# Altium PCB StepperV2.PcbDoc
Units mil, origin at the board's own origin, x right, y up, seen from the top; angles counter-clockwise.
Board outline 4995 x 4000 mil, 2 copper layers (Top Layer, Bottom Layer); 58 components, 47 nets, 208 pads, 181 vias.
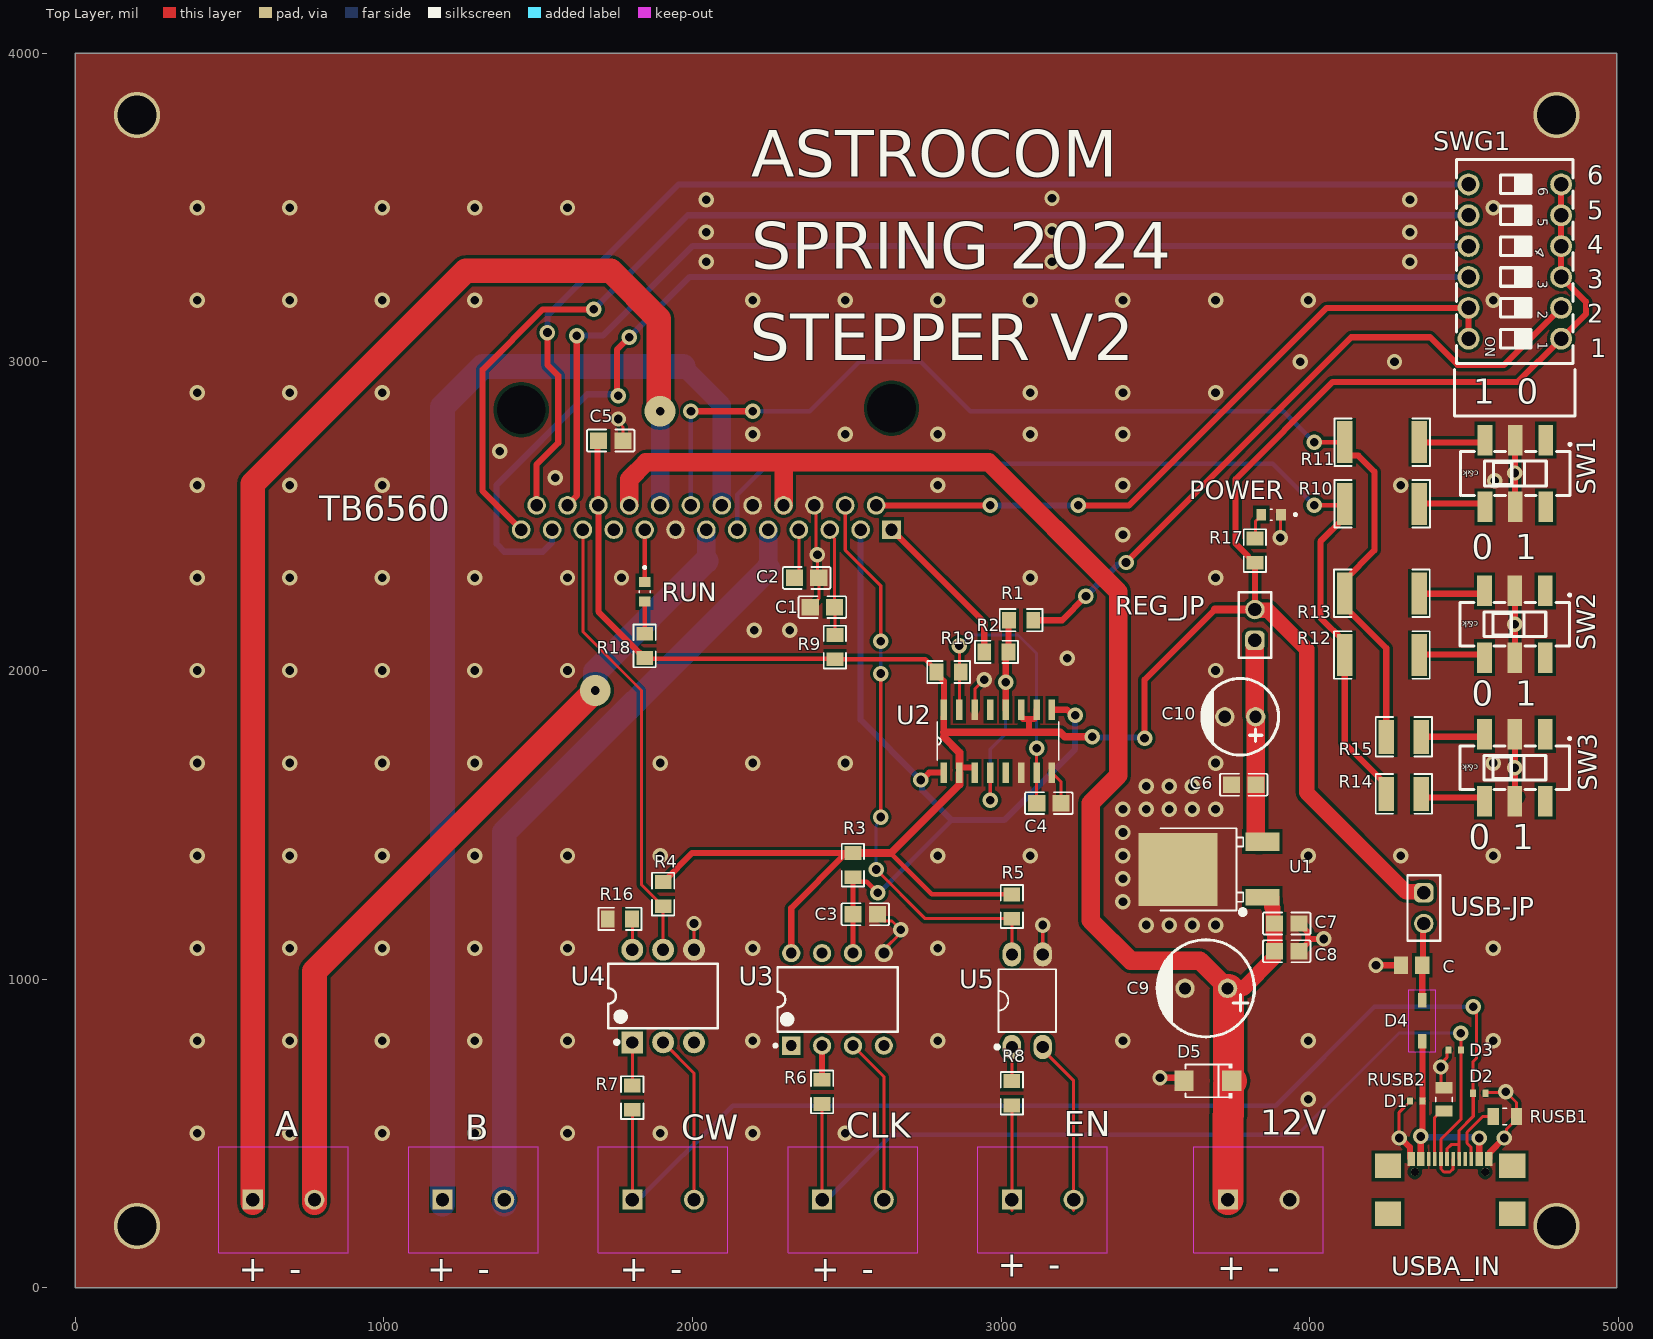
[diagram p0: Top Layer view]
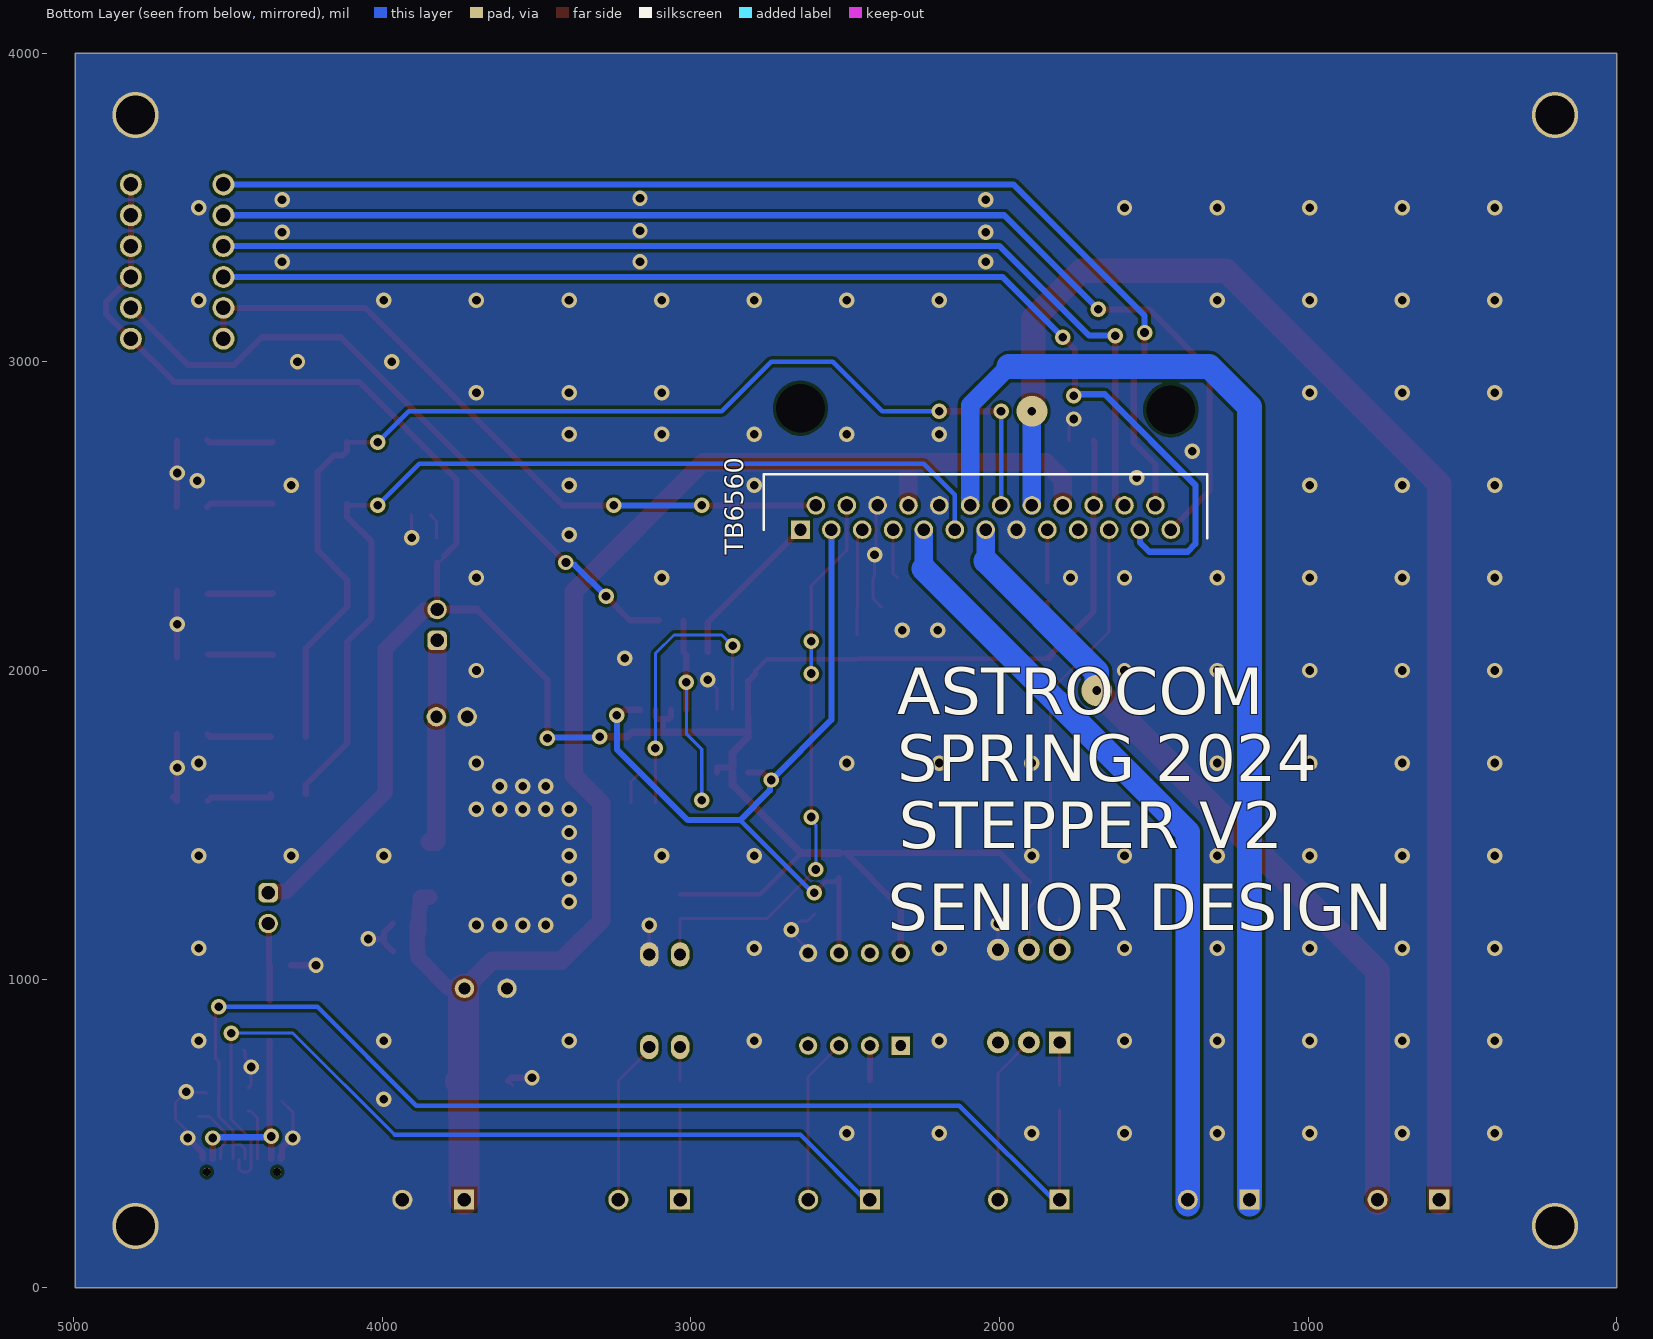
[diagram p1: Bottom Layer view, seen from below]
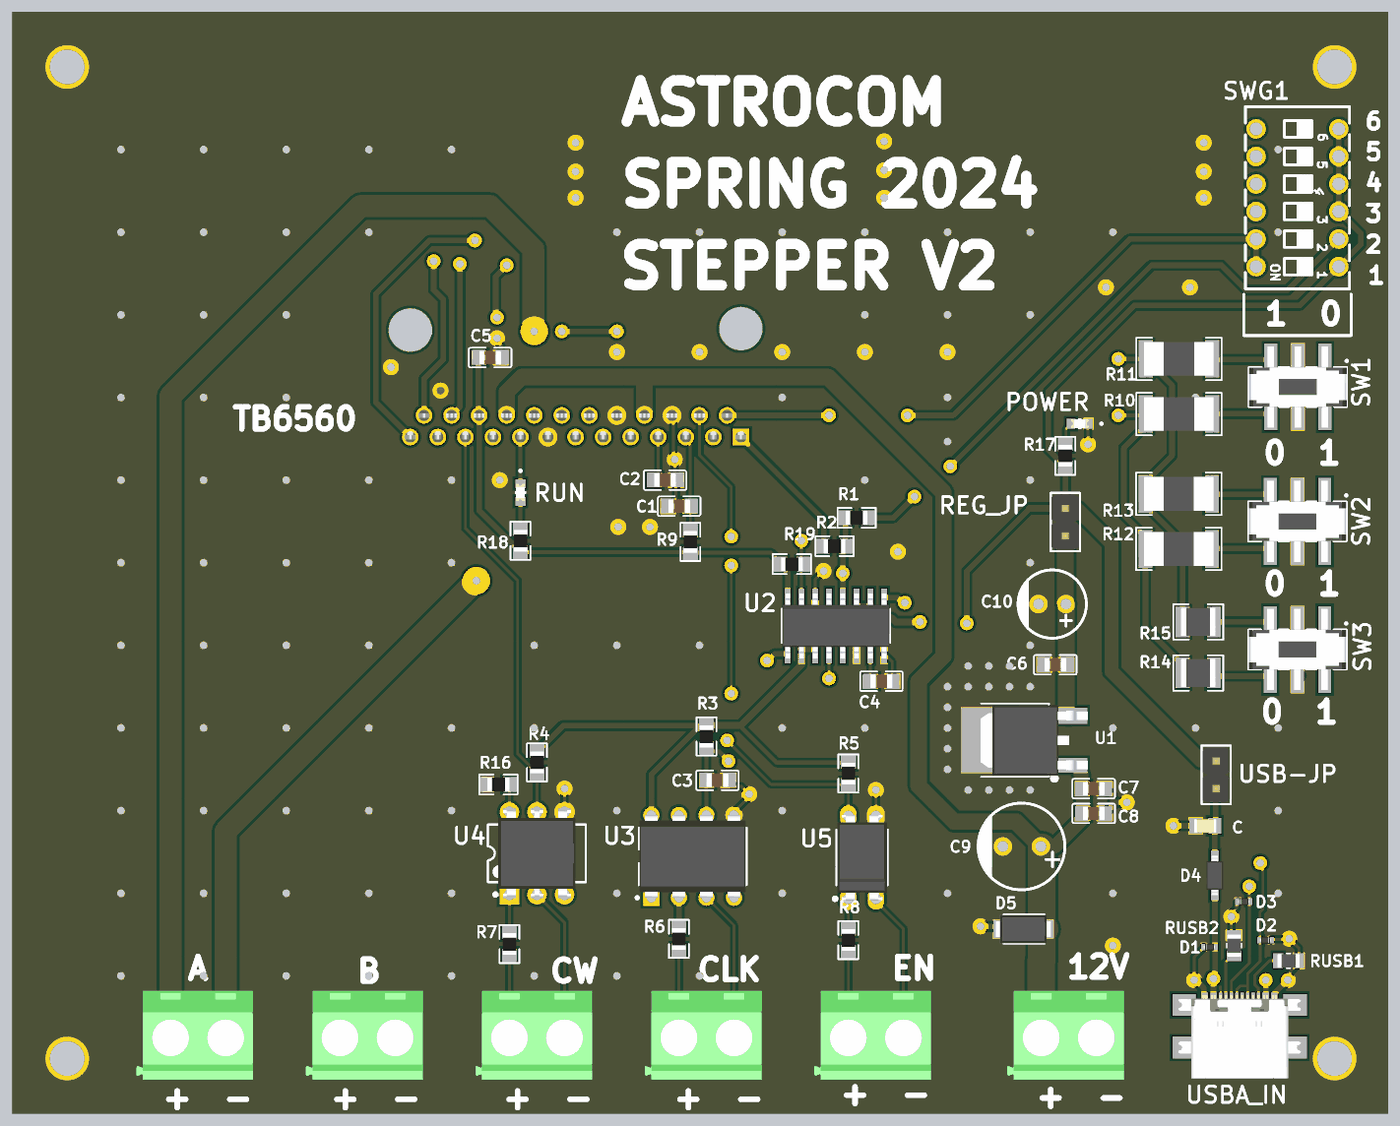
[diagram p2: 3D render of the assembled board from above, using the file's embedded part models]

## Layer stack, top to bottom
Top Solder: solder mask 0.4, Solder Resist, Dk 3.5
Top Layer: signal copper 1.4
Dielectric 1: dielectric 12.6, FR-4, Dk 4.8
Bottom Layer: signal copper 1.4
Bottom Solder: solder mask 0.4, Solder Resist, Dk 3.5

## Board outline
0,0 4995,0 4995,4000 0,4000

## Design rules (kind name [scope] priority, off if disabled: settings)
Clearance [All] p1: gap=10 ignorepadtopadclearanceinfootprint=FALSE
HoleSize [All] p1: absolutevalues=TRUE maxlimit=500 minlimit=1 maxpercent=80.000 minpercent=20.000
PolygonConnect [All] p1: connectstyle=Direct reliefconductorwidth=10 reliefentries=4 polygonreliefangle="90 Angle" airgapwidth=10
RoutingVias [All] p1: holewidth=28 width=50 viastyle="Through Hole" minholewidth=28 minwidth=50 maxholewidth=28 maxwidth=50
SolderMaskExpansion [All] p1: expansion=4 istentingtop=FALSE
Width [All] p1: maxlimit=100 minlimit=10 preferedwidth=10 minimp=50.000000 maximp=50.000000 favimp=50.000000
29 further rules are at their usual default settings.

## Components (designator, comment, footprint, x,y, rotation, side; value= is the part's Value field where it differs from the comment)
12V "Term Block" TE_282837-2 3835,285 r0 top
A "Term Block" TE_282837-2 675,285 r0 top
B "Term Block" TE_282837-2 1290,285 r0 top
C "C0805C106J8RACAUTO" CAPC2012X88N 4330.55,1045 r180 top
C1 "100nF" C0805 2421.1,2205.16 r0 top
C2 "100nF" C0805 2370,2300 r0 top
C3 "100nF" C0805 2560,1210 r0 top
C4 "100nF" C0805 3155,1570 r180 top
C5 "100nF" C0805 1735,2745 r0 top
C6 "100nF" C0805 3786.26,1629.6 r0 top
C7 "100nF" C0805 3925.63,1180 r180 top
C8 "100nF" C0805 3925.63,1090 r180 top
C9 "330uF" CAP-TH_BD8.0-P3.50-D0.6-FD 3665,970 r180 top
C10 "220uF" CAP-TH_BD6.3-P2.50-D1.0-FD 3775,1850 r180 top
CLK "Term Block" TE_282837-2 2520,285 r0 top
CW "Term BLock" TE_282837-2 1905,285 r0 top
D1 "CPDQ5V0-HF" MBTB-D-SOD-923F-IMP-0402 4345.67,605 r0 top
D2 "CPDQ5V0-HF" MBTB-D-SOD-923F-IMP-0402 4549.33,630 r180 top
D3 "CPDQ5V0-HF" MBTB-D-SOD-923F-IMP-0402 4470,770 r0 top
D4 "SCHOTTKY DIODE" SOD3715X145N 4365,865 r270 top
D5 "M7-C366566" SMAF_L3.5-W2.6-LS4.7-RD 3670,670 r180 top
EN "Term Block" TE_282837-2 3135,285 r0 top
POWER "LTST-C190GKT" LEDC1608X35N 3875,2505 r180 top
R1 "4.7kΩ" R0805 3065,2163 r180 top
R2 "4.7kΩ" R0805 2985,2060 r0 top
R3 "4.7kΩ" R0805 2520,1369.37 r270 top
R4 "4.7kΩ" R0805 1905,1275 r90 top
R5 "4.7kΩ" R0805 3035,1235 r90 top
R6 "330Ω" R0805 2420,634.37 r90 top
R7 "330Ω" R0805 1805,615.63 r90 top
R8 "330Ω" R0805 3035,630 r90 top
R9 "12kΩ" R0805 2461.73,2075.79 r270 top
R10 "330mΩ" R2512 4235,2540 r180 top
R11 "330mΩ" R2512 4235,2740 r180 top
R12 "500mΩ" R2512 4234.28,2050 r180 top
R13 "500mΩ" R2512 4234.28,2250 r180 top
R14 "1.2Ω" R1210 4305,1600 r180 top
R15 "1.2Ω" R1210 4305,1785 r180 top
R16 "100kΩ" R0805 1765,1195 r0 top
R17 "1kΩ" R0805 3822.56,2388.19 r90 top
R18 "1kΩ" R0805 1845,2080 r270 top
R19 "500kΩ" R0805 2830,1995 r180 top
REG_JP "61300211121" 61300211121 3822.56,2147.48 r90 top
RUN "LTST-C190GKT" LEDC1608X35N 1845,2255 r270 top
RUSB1 "RC0805JR-075K1L" RESC2012X60N 4632.6,555 r180 top
RUSB2 "RC0805JR-075K1L" RESC2012X60N 4435,610 r270 top
SW1 "JS202011SCQN" SW-SMD_JS202011SCQN 4666.57,2638.27 r180 top
SW2 "JS202011SCQN" SW-SMD_JS202011SCQN 4665,2150 r180 top
SW3 "JS202011SCQN" SW-SMD_JS202011SCQN 4665,1685 r180 top
SWG1 "DSWB06LHGET" SW-TH_DSWB06LHGET 4665,3325 r90 top
TB6560 "TB6560AHQ_8" TO127P530X3650X1770-25P 2645,2456.26 r180 bottom
U1 "78M05" TO-252-2_L6.5-W6.1-P4.58-LS10.0-TL 3710,1355 r180 top
U2 "74HC123D,653" SOIC127P600X175-16N 2990,1771 r90 top
U3 "6N137_C142297" DIP-8_L9.8-W6.6-P2.54-LS7.6-BL 2470,934.09 r0 top
U4 "4N35" DIP-6_L8.5-W6.4-P2.54-LS7.6-BL 1905,945 r0 top
U5 "PC817C_C3025068" DIP-4_L4.6-W6.5-P2.54-LS7.6-BL 3085,930 r0 top
USB-JP "61300211121" 61300211121 4370,1230 r270 top
USBA_IN "USB4110-GF-A" USB4110-GF-A_GCT 4455,285 r0 top

## Footprints (in the part's own frame and the unit in brackets; to place one, negate y for a bottom-side part, rotate by r counter-clockwise, add the part's x,y. Pads: shape width x height; smd on the part's side, far side on the other; paste and mask are expansions set on the pad)
61300211121 [mm] "Pin Header, pitch 2.54 mm, THT, Vertical, single row, 2p"
  rrect50% 1.6x1.6 hole 1.1: 1(-1.27,0)
  round 1.6 hole 1.1: 2(1.27,0)
  silkscreen extent -2.69,-1.35 2.69,1.35, body extent -2.54,-1.27 2.54,1.27, height 8.57
C0805 [mm]
  rect 1.41x1.35 smd paste-100 mask+0.051: 1(-1,0) 2(1,0)
  silkscreen extent -1.96,-0.9 1.96,0.9, body extent -1,-0.63 1,0.63, height 0.94
CAP-TH_BD6.3-P2.50-D1.0-FD [mm]
  round 1.6 hole 1 paste-2539.97 mask+0.051: 1(-1.27,0) 2(1.27,0)
  silkscreen extent -3.15,-3.15 3.17,3.15
CAP-TH_BD8.0-P3.50-D0.6-FD [mm]
  round 1.6 hole 1 paste-2539.97 mask+0.051: 1(-1.75,0) 2(1.75,0)
  silkscreen extent -3.96,-4 4.04,4
CAPC2012X88N [mm]
  rect 1.16x1.47 smd: 1(-0.875,0) 2(0.875,0)
  body extent -1.02,-0.64 1.02,0.64, height 1.4
DIP-4_L4.6-W6.5-P2.54-LS7.6-BL [mm]
  oval 1.524x2 hole 1 paste-2539.97 mask+0.051: 1(-1.27,-3.81) 2(1.27,-3.81) 3(1.27,3.81) 4(-1.27,3.81)
  silkscreen extent -2.63,-3.96 2.38,2.58, body extent -2.29,-3.94 2.29,3.94, height 4.8
DIP-6_L8.5-W6.4-P2.54-LS7.6-BL [mm]
  rect 1.8x1.8 hole 1 paste-2539.97 mask+0.051: 1(-2.54,-3.81)
  round 1.8 hole 1 paste-2539.97 mask+0.051: 2(0,-3.81) 3(2.54,-3.81) 4(2.54,3.81) 5(0,3.81) 6(-2.54,3.81)
  silkscreen extent -4.52,-3.95 4.5,2.65, body extent -3.56,-4.4 3.56,4.4, height 4.8
DIP-8_L9.8-W6.6-P2.54-LS7.6-BL [mm]
  rect 1.5x1.5 hole 0.9 paste-2539.97 mask+0.051: 1(-3.81,-3.81)
  round 1.5 hole 0.9 paste-2539.97 mask+0.051: 2(-1.27,-3.81) 3(1.27,-3.81) 4(3.81,-3.81) 5(3.81,3.81) 6(1.27,3.81) 7(-1.27,3.81) 8(-3.81,3.81)
  silkscreen extent -5.23,-3.93 4.96,2.65, body extent -4.88,-3.81 4.88,3.81, height 4.96
LEDC1608X35N [mm]
  rect 0.81x0.93 smd: A(0.81,0) C(-0.81,0)
  silkscreen extent -2.1,-0.45 0.09,0.45, body extent -0.8,-0.4 0.8,0.4, height 0.8
MBTB-D-SOD-923F-IMP-0402 [mm]
  rect 0.5x0.6 smd: 1(-0.525,0) 2(0.525,0)
  body extent -0.52,-0.33 0.52,0.33, height 0.82
R0805 [mil]
  rect 44.59x54.21 smd paste-3937.01 mask+2: 1(-39.37,0) 2(39.37,0)
  silkscreen extent -69,-36 69,36, body extent -39,-25 39,25, height 24
R1210 [mil]
  rect 50.49x110.55 smd paste-3937.01 mask+2: 1(-56.74,0) 2(56.74,0)
  silkscreen extent -91,-64 91,64, body extent -63,-51 63,51, height 28
R2512 [mil]
  rect 50.49x136.06 smd paste-3937.01 mask+2: 1(-120.72,0) 2(120.72,0)
  silkscreen extent -155,-77 155,77, body extent -126,-61 126,61, height 30
RESC2012X60N [mm]
  rect 0.92x1.38 smd: 1(-0.955,0) 2(0.955,0)
  silkscreen extent -0.17,-0.68 0.17,0.68, body extent -1,-0.63 1,0.63, height 0.6
SMAF_L3.5-W2.6-LS4.7-RD [mm]
  rect 1.6x1.7 smd paste+0 mask+0.051: 1(-1.96,0) 2(1.96,0)
  silkscreen extent -2.01,-1.43 1.83,1.42, body extent -2.61,-1.3 2.61,1.3, height 2.4
SOD3715X145N [mm]
  rect 1.21x0.73 smd: A(1.68,0) C(-1.68,0)
  Top Layer keep-out lines w0.05: 2.535,-1.1 2.535,1.1 -2.535,1.1 -2.535,-1.1 2.535,-1.1
  body extent -1.83,-0.77 1.83,0.77, height 1.51
SOIC127P600X175-16N [mil]
  rect 67x21 smd: 1(-102,175) 2(-102,125) 3(-102,75) 4(-102,25) 5(-102,-25) 6(-102,-75) 7(-102,-125) 8(-102,-175) 9(102,-175) 10(102,-125) 11(102,-75) 12(102,-25) 13(102,25) 14(102,75) 15(102,125) 16(102,175)
  silkscreen extent -62,-197 62,197, body extent -118,-195 118,195, height 69
SW-SMD_JS202011SCQN [mm]
  rect 1.2x2.5 smd paste+0 mask+0.051: 1(-2.5,-2.75) 2(0,-2.75) 3(2.5,-2.75) 4(-2.5,2.75) 5(0,2.75) 6(2.5,2.75)
  silkscreen extent -4.6,-2.5 4.5,1.8, body extent -4.5,-3.75 4.5,3.75, height 5.51
SW-TH_DSWB06LHGET [mm]
  round 1.8 hole 1.2 paste-2539.97 mask+0.051: 1(-6.35,3.81) 2(-3.81,3.81) 3(-1.27,3.81) 4(1.27,3.81) 5(3.81,3.81) 6(6.35,3.81) 7(-6.35,-3.81) 8(-3.81,-3.81) 9(-1.27,-3.81) 10(1.27,-3.81) 11(3.81,-3.81) 12(6.35,-3.81)
  silkscreen extent -8.4,-4.8 8.4,4.8
TE_282837-2 [mil]
  rect 64.97x64.97 / inner round 60.02 / far side rect 64.97x64.97 hole 43.31: 1(-100,0)
  round 64.97 hole 43.31: 2(100,0)
  Top Layer keep-out lines w1.97: -209.84,-171.26 -209.84,171.26 209.84,171.26 209.84,-171.26 -209.84,-171.26
  body extent -224,-161 200,161, height 394
TO127P530X3650X1770-25P [mm]
  rect 1.53x1.53 / inner round 1.53 / far side rect 1.53x1.53 hole 1.02: 1(0,0)
  round 1.53 hole 1.02: 2(1.27,2) 3(2.54,0) 4(3.81,2) 5(5.08,0) 6(6.35,2) 7(7.62,0) 8(8.89,2) 9(10.16,0) 10(11.43,2) 11(12.7,0) 12(13.97,2) 13(15.24,0) 14(16.51,2) 15(17.78,0) 16(19.05,2) 17(20.32,0) 18(21.59,2) 19(22.86,0) 20(24.13,2) 21(25.4,0) 22(26.67,2) 23(27.94,0) 24(29.21,2) 25(30.48,0)
  silkscreen extent -3.01,-0.72 33.49,4.57, body extent -2.76,-0.43 33.24,4.57, height 16.53
TO-252-2_L6.5-W6.1-P4.58-LS10.0-TL [mm]
  rect 2.8x1.35 smd paste+0 mask+0.051: 1(-3.475,2.29)
  rect 2.8x1.5 smd paste+0 mask+0.051: 3(-3.475,-2.29)
  rect 6.5x6 smd paste+0 mask+0.051: 4(3.475,-0.017)
  silkscreen extent -2.06,-3.39 4.9,3.7, body extent -4.95,-3.25 4.95,3.25, height 2.39
USB4110-GF-A_GCT [mil]
  round 26 hole 26: 13(-114,90) 14(114,90)
  rect 85x79 smd: 15(-201.18,109.76) 16(201.18,109.76) 17(-201.18,-44.97) 18(201.18,-44.97)
  rect 24x45 smd: A1-B12(-125.98,132.39) A4-B9(-94.49,132.39) A9-B4(94.49,132.39) A12-B1(125.98,132.39)
  rect 12x45 smd: A5(-49.21,132.39) A6(-9.84,132.39) A7(9.84,132.39) A8(49.21,132.39) B5(68.9,132.39) B6(29.53,132.39) B7(-29.53,132.39) B8(-68.9,132.39)
  body extent -222,-157 222,146, height 128

## Part data
12V A B CLK CW EN: library part 282837-2, PACKAGE=TE_282837-2, AVAILABILITY="In Stock", CHECK_PRICES=https://www.snapeda.com/parts/282837-2/TE+Connectivity+AMP+Connectors/view-part/?ref=eda, DeviceSetName=282837-2, GateName_1=G$1, LibraryName=Terminal_Block2P, MF="TE Connectivity", MP=282837-2, PRICE=None, PURCHASE-URL=https://pricing.snapeda.com/search?q=282837-2&ref=eda, SNAPEDA_LINK=https://www.snapeda.com/parts/282837-2/TE+Connectivity+AMP+Connectors/view-part/?ref=snap, SymbolName_1=282837-2
C: "10ÂµF Â±5% 10V Ceramic Capacitor X7R 0805 _2012 Metric_", PACKAGE="0805 KEMET", AVAILABILITY=Unavailable, MF=KEMET, MP=C0805C106J8RACAUTO, PRICE=None, SNAPEDA_LINK=https://www.snapeda.com/parts/C0805C106J8RACAUTO/KEMET/view-part/3596814/?ref=snap
C1 C2 C3 C4 C5 C6 C7 C8: JLCPCB Part Class="Extended Part", Manufacturer=FH(风华), Manufacturer Part=0805B104J500NT, nameAlias=Value, spicePre=C, spiceSymbolName=0805B104J500NT, Supplier=LCSC, Supplier Part=C29926
C9: JLCPCB Part Class="Extended Part", Manufacturer=CX(承兴), Manufacturer Part=GR337M050F20RR0VL4FP0, nameAlias=Value, spicePre=C, spiceSymbolName="330uF 50V 8*20Green high frequency", Supplier=LCSC, Supplier Part=C45106
C10: JLCPCB Part Class="Extended Part", Manufacturer=CX(承兴), Manufacturer Part=KM227M016E11RR0VH2FP0, nameAlias=Value, spicePre=C, spiceSymbolName="220uF 16V 6.3*11", Supplier=LCSC, Supplier Part=C43349
D1 D2 D3: "ESD Suppressors / TVS Diodes SMD ESD Diode 5V Bi-Direction   Source:  Datasheet   Check availability", PACKAGE=MBTB-D-SOD-923F-IMP-0402, AVAILABILITY="In Stock", CHECK_PRICES=https://www.snapeda.com/parts/CPDQ5V0-HF/Comchip+Technology/view-part/?ref=eda, DeviceSetName=CPDQ5V0-HF, GateName_1=G$1, LibraryName=CPDQ5V0-HF, MF="Comchip Technology", MP=CPDQ5V0-HF, PRICE=None, PURCHASE-URL="https://www.snapeda.com/api/url_track_click_mouser/?unipart_id=809934&manufacturer=Comchip Technology&part_name=CPDQ5V0-HF&search_term=cpdq5v0-hf", SNAPEDA_LINK=https://www.snapeda.com/parts/CPDQ5V0-HF/Comchip+Technology/view-part/?ref=snap, SymbolName_1=CPDQ5V0-HF
D4: library part 1N5819HW-7-F, PACKAGE=SOD3715X145N, AVAILABILITY="In Stock", CHECK_PRICES=https://www.snapeda.com/parts/1N5819HW-7-F/Diodes+Inc./view-part/?ref=eda, DeviceSetName=1N5819HW-7-F, GateName_1=G$1, LibraryName=1N5819HW-7-F, MF="Diodes Inc.", MP=1N5819HW-7-F, PRICE=None, PURCHASE-URL="https://www.snapeda.com/api/url_track_click_mouser/?unipart_id=42272&manufacturer=Diodes Inc.&part_name=1N5819HW-7-F&search_term=1n5819hw-7-f", SNAPEDA_LINK=https://www.snapeda.com/parts/1N5819HW-7-F/Diodes+Inc./view-part/?ref=snap, SymbolName_1=1N5819HW-7-F
D5: JLCPCB Part Class="Extended Part", Manufacturer=DOWO(东沃), Manufacturer Part=M7, Contributor=LCSC, spicePre=D, spiceSymbolName=M7-C366566, Supplier=LCSC, Supplier Part=C366566
POWER RUN: "LED; SMD; 0603; Green; 18-180mcd; 1.6x0.8x0.8mm; 130Â°; 1.6Ã·2.4V; 20mA <a href=\"https://pricing.snapeda.com/parts/LTST-C190GKT/Lite-On%20Inc./view-part?ref=eda\">Check availability</a>", PACKAGE=None, AVAILABILITY=Unavailable, MF="{'manufacturer': u'Lite-On Inc.'}", MP=LTST-C190GKT, PRICE=None
R1 R2 R3 R4 R5: JLCPCB Part Class="Extended Part", Manufacturer=FH(风华), Manufacturer Part=RS-05K472JT, nameAlias=Value, spicePre=R, spiceSymbolName=RS-05K472JT, Supplier=LCSC, Supplier Part=C115310
R6 R7 R8: JLCPCB Part Class="Extended Part", Manufacturer="EVER OHMS(天二科技)", Manufacturer Part=CR0805J330RP05Z, Contributor=LCSC, nameAlias=Value, spicePre=R, spiceSymbolName=CR0805J330RP05Z, Supplier=LCSC, Supplier Part=C881004
R9: JLCPCB Part Class="Extended Part", Manufacturer=UNI-ROYAL(厚声), Manufacturer Part=0805W8J0123T5E, nameAlias=Value, spicePre=R, spiceSymbolName=0805W8J0123T5E, Supplier=LCSC, Supplier Part=C25616
R10 R11: JLCPCB Part Class="Extended Part", Manufacturer="EVER OHMS(天二科技)", Manufacturer Part=CRH2512JR330E04Z, Contributor=LCSC, nameAlias=Value, spicePre=R, spiceSymbolName=CR2512J0R33E042W, Supplier=LCSC, Supplier Part=C176087
R12 R13: JLCPCB Part Class="Extended Part", Manufacturer="SEI(Stackpole Electronics Inc.)", Manufacturer Part=CSRN2512FKR500, Contributor=LCSC, nameAlias=Value, spicePre=R, spiceSymbolName=CSRN2512FKR500, Supplier=LCSC, Supplier Part=C346810
R14 R15: JLCPCB Part Class="Extended Part", Manufacturer="EVER OHMS(天二科技)", Manufacturer Part=CR1210F1R20P05S, Contributor=LCSC, nameAlias=Value, spicePre=R, spiceSymbolName=CR1210F1R2P05, Supplier=LCSC, Supplier Part=C174381
R16: JLCPCB Part Class="Extended Part", Manufacturer=RALEC(旺诠), Manufacturer Part=RTT05104JTP, nameAlias=Value, spicePre=R, spiceSymbolName=RTT05104JTP, Supplier=LCSC, Supplier Part=C103915
R17 R18: JLCPCB Part Class="Extended Part", Manufacturer=YAGEO(国巨), Manufacturer Part=RC0805JR-071KL, nameAlias=Value, spicePre=R, spiceSymbolName=RC0805JR-071KL, Supplier=LCSC, Supplier Part=C100046
R19: JLCPCB Part Class="Extended Part", Manufacturer=Viking(光颉), Manufacturer Part=AR05BTCW5003, Contributor=LCSC, nameAlias=Value, spicePre=R, spiceSymbolName=AR05BTCW5003, Supplier=LCSC, Supplier Part=C316218
REG_JP USB-JP: library part CMP-1712-00002-5, Color=Black, Contact Resistance=20mΩ, Current Rating=3A, Max Operating Temperature=125°C, Min Operating Temperature=-40°C, Operating Supply Voltage=250V, Connector Type="Male Pin", Contact Gender=Male, Contact Material=Copper, Contact Mating Length=5.9944mm, Contact Plating=Gold, Gender=Male, Height=8.94mm, Housing Material=PBT, Lead Free="Lead Free", Lead Pitch=2.54mm, Mount="Through Hole", NexarPartId=20081794, Number of Contacts=2, Number of Pins=2, Number of Positions=2, Number of Rows=1, Orientation=Vertical, Packaging=Bulk, Pitch=2.54mm, REACH SVHC="No SVHC", RoHS=Compliant, Termination="Through Hole", Voltage Rating=250V
RUSB1 RUSB2: "RC0805 5,1K 5% 0,125W", PACKAGE=None, AVAILABILITY=Unavailable, MP=RC0805JR-075K1L, PRICE=None
SW1 SW2 SW3: JLCPCB Part Class="Extended Part", Manufacturer=C&K, Contributor=LCSC, Manufacturer Part=JS202011SCQN, spicePre=S, spiceSymbolName=JS202011SCQN, Supplier=LCSC, Supplier Part=C221666
SWG1: JLCPCB Part Class="Extended Part", Manufacturer=YE, Contributor=LCSC, Manufacturer Part=DSWB06LHGET, spicePre=S, spiceSymbolName=DSWB06LHGET, Supplier=LCSC, Supplier Part=C99416
TB6560: "Motor / Motion / Ignition Controllers & Drivers Stepping Motor Driver IC", Manufacturer_Name=Toshiba, MANUFACTURER_PART_NUMBER=TB6560AHQ,8, Datasheet Link=http://toshiba.semicon-storage.com/info/docget.jsp?did=11252&prodName=TB6560AHQ, Geometry.Height=5.3mm
U1: JLCPCB Part Class="Extended Part", Manufacturer=SHIKUES(时科), Manufacturer Part=78M05, spicePre=U, spiceSymbolName=78M05, Supplier=LCSC, Supplier Part=C111265
U2: "Monostable Multivibrator 65ns 16-SO", PACKAGE="SO16-16 Nexperia USA Inc.", CHECK_PRICES=https://www.snapeda.com/parts/74HC123D,653/Nexperia/view-part/2882374/?ref=eda, Digi-Key_Part_Number=1727-2778-1-ND, MF="Nexperia USA", MP=74HC123D,653, PURCHASE-URL=https://pricing.snapeda.com/search/part/74HC123D,653/?ref=eda, SNAPEDA_LINK=https://www.snapeda.com/parts/74HC123D,653/Nexperia/view-part/2882374/?ref=snap
U3: JLCPCB Part Class="Extended Part", Manufacturer=EVERLIGHT(亿光), Manufacturer Part=6N137, Contributor=LCSC, spicePre=U, spiceSymbolName=6N137_C142297, Supplier=LCSC, Supplier Part=C142297
U4: JLCPCB Part Class="Extended Part", Manufacturer=EVERLIGHT(亿光), Manufacturer Part=4N35, spicePre=U, spiceSymbolName=4N35, Supplier=LCSC, Supplier Part=C57084
U5: JLCPCB Part Class="Extended Part", Manufacturer=GOODWORK(固得沃克), Manufacturer Part=PC817C, Contributor=lcsc, spicePre=U, spiceSymbolName=PC817C_C3025068, Supplier=LCSC, Supplier Part=C3025068
USBA_IN: MFR_NAME="Global Connector Technology", PACKAGE=USB4110-GF-A_GCT, COPYRIGHT="Copyright (C) 2023 Ultra Librarian. All rights reserved.", DeviceSetName=USB4110-GF-A, GateName_1=A, LibraryName=USB4110-GF-A, MANUFACTURER_PART_NUMBER=USB4110-GF-A, SymbolName_1=USB4110-GF-A

## Free pads (board coordinates)
  round 150 hole 126: MH1(200,200) MH2(4800,200) MH3(4800,3800) MH4(200,3800)

## Via types
v1: diameter 50, hole 28, Top Layer to Bottom Layer, 177 vias
v2: diameter 50/50 (per signal layer), hole 157.48, Top Layer to Bottom Layer, 2 vias
v3: diameter 100, hole 28, Top Layer to Bottom Layer, 2 vias

## Nets (pads, with @x,y where several pads share a name; then routed paths per layer and width w, separated by ;. In a path a pad name is that pad's centre, name@x,y a point inside that pad or via, vN(x,y) a via of type N, cw(c..) or ccw(c..) an arc to the next point about the centre after c; other vN are vias at no path point)
5V: C5.1 R3.1 R4.2 R5.2 R9.2 R17.1 R18.2 R19.2 REG_JP.2 SWG1.7 SWG1.9 SWG1.10 SWG1.11 SWG1.12 TB6560.20 U2.2 U2.3 U2.10 U2.11 U2.16 U3.8 USB-JP.1 | length 9063.9
  Top Layer w10: R17.1@3800.45,2370.92 3800.45,2366.11 3817.75,2348.81 R17.1
  Top Layer w15: R18.2 1847.11,2038.52 2459.62,2038.52 R9.2 2754.03,2036.41 2790.63,1999.81 R19.2 R19.2@2790.63,1990.19 ; R3.1@2498.74,1408.74 R3.1 ; 2641.26,1408.74 2775.63,1274.37 R5.2
  Top Layer w20: C5.1 1692.19,2741.56 1692.19,2537.81 TB6560.20 1695,2190.63 1827.89,2057.73 1827.89,2052.92 1840.19,2040.63 R18.2 ; R4.2 1999.37,1408.74 2498.74,1408.74 2320,1230 U3.8 ; R19.2@2790.63,1990.19 2815,1965.82 2815,1850 2814.5,1849.5 2814.5,1842.64 2814.21,1842.35 2814.21,1800 2814.21,1785 ; U2.2@2865,1685.72 U2.2 2865,1685.22 2865.5,1685.72 2914.5,1685.72 2915,1685.22 U2.3 ; U2.11 3065,1850 3071.79,1843.21 3090,1843.21 ; 3090,1800 3090,1843.21 ; U2.10 3115,1850 3108.21,1843.21 3090,1843.21 ; v1(3465,1780) 3465,1970 3692.48,2197.48 ; R17.1@3800.45,2370.92 3760,2411.37 3760,2620 4075,2935 4675,2935 SWG1.7 4895,3155 4895,3195 SWG1.9 SWG1.10 SWG1.11 SWG1.12 ; REG_JP.2 R17.1
  Top Layer w25: R3.1 2643.74,1408.74 2865,1630 U2.2 ; 2814.21,1785 2865,1734.21 U2.2@2865,1685.72 ; 2814.21,1800 3090,1800 3191.21,1800 3205.99,1785.22 v1(3295.22,1785.22) ; 3692.48,2197.48 REG_JP.2
  Top Layer w50: REG_JP.2 3825.04,2194.99 3865.01,2194.99 3990.34,2069.66 3990.34,1604.66 4312.58,1282.42 4367.58,1282.42 USB-JP.1
  Bottom Layer w20: v1(3295.22,1785.22) 3297.82,1782.61 3462.39,1782.61 v1(3465,1780)
CC1: RUSB2.2 USBA_IN.A5 | length 172.7
  Top Layer w10: USBA_IN.A5@4405,417.39 4405,551.46 4425.94,572.4 RUSB2.2
CC2: RUSB1.2 USBA_IN.B5 | length 198
  Top Layer w10: USBA_IN.B5 4523.9,434.39 4523.4,434.89 4523.4,446.6 4522.49,447.51 4522.49,455.94 4510,468.43 4510,503.11 4561.89,555 RUSB1.2
CLK: C3.1 R3.2 TB6560.3 U2.1 U2.9 U3.6 | length 2520.6
  Top Layer w15: U3.6 2520,1209.37 C3.1 2520,1210.63 R3.2 2534.79,1315.21 2564.79,1315.21 v1(2600,1280)
  Top Layer w20: v1(2740,1645) 2742.72,1645 2766.72,1669 U2.1 ; U2.9 3213.88,1873 3231.88,1855 v1(3240,1855)
  Bottom Layer w15: v1(2600,1280) 2605,1280 2840,1515
  Bottom Layer w20: TB6560.3 2545,1840 v1(2740,1645) 2743.89,1641.11 2743.89,1611.11 2840,1515 3010,1515 3240,1745 v1(3240,1855)
CLK+: CLK.1 D3.2 R6.1 USBA_IN.A7 USBA_IN.B7 | length 3172.6
  Top Layer w10: CLK.1@2420,270 R6.1 ; USBA_IN.A7 4464.84,384.84 4455,375 4435,375 4425.47,384.53 4425.47,480.47 4490.67,545.67 D3.2 4490.34,770.34 4490.34,824.66 v1(4490,825)
  Bottom Layer w10: 3960,495 4290,825 v1(4490,825)
  Bottom Layer w15: CLK.1@2420,270 2645,495 3960,495
CLK-: CLK.2 U3.3 | length 555.5
  Top Layer w10: U3.3 2620,684.09 CLK.2@2620,270
CW: R4.1 TB6560.21 U4.5 | length 1471.8
  Top Layer w10: TB6560.21 1645,2125 1835,1935 1835,1305.63 1882.89,1257.73 1882.89,1252.92 1900.19,1235.63 R4.1 U4.5
DCY1: SWG1.5 TB6560.25 | length 3972.6
  Top Layer w20: TB6560.25 1320,2581.26 1320,2975 1515,3170 v1(1680,3170)
  Bottom Layer w20: v1(1680,3170) 1985,3475 SWG1.5
DCY2: SWG1.6 TB6560.24 | length 3819.5
  Top Layer w20: TB6560.24 1495,2667.5 1565,2737.5 1565,2955 1530,2990 v1(1530,3095)
  Bottom Layer w20: v1(1530,3095) 1530,3150 1955,3575 SWG1.6
DIR+: CW.1 D2.2 R7.1 USBA_IN.A6 USBA_IN.B6 | length 3901.9
  Top Layer w10: CW.1@1805,265 R7.1 ; USBA_IN.A6 4445.16,450.16 4458.46,463.46 4484.53,463.46 ; USBA_IN.B6 4484.53,463.46 ; v1(4530,910) 4530,899.18 4540,889.18 4540,742.68 4528.66,731.34 D2.2 4530,628.66 4530,555 4484.53,509.53 4484.53,463.46
  Bottom Layer w15: CW.1@1805,265 2130,590 3890,590 4210,910 v1(4530,910)
DIR-: CW.2 U4.2 | length 571.4
  Top Layer w10: U4.2 2005,695 CW.2@2005,265
EN: R5.1 TB6560.4 U5.4 | length 1855.5
  Top Layer w10: TB6560.4 2495,2390 2610,2275 v1(2610,2095) ; v1(2595,1355) 2754.37,1195.63 R5.1 U5.4 ; v1(2610,1525) v1(2610,1990)
  Bottom Layer w10: v1(2595,1355) 2595,1499.18 2610,1514.18 v1(2610,1525) ; v1(2610,1990) v1(2610,2095)
EN+: EN.1 R8.1 | length 340.6
  Top Layer w10: 3035,250 R8.1
EN-: EN.2 U5.2 | length 571.4
  Top Layer w10: U5.2 3135,770.63 3235,670.63 3235,250
GND: 12V.2 C1.1 C2.2 C3.2 C4.1 C5.2 C6.1 C7.1 C8.1 C9.2 C10.2 C.2 D1.1 D2.1 D3.1 D5.2 pad.MH1 pad.MH2 pad.MH3 pad.MH4 POWER.C R16.1 RUSB1.1 RUSB2.1 SW1.2 SW1.5 SW2.2 SW2.5 SW3.2 SW3.5 TB6560.6 TB6560.10 TB6560.15 U1.4 U2.6 U2.8 U2.14 U3.5 U4.4 U5.3 USBA_IN.A1-B12 USBA_IN.A12-B1 USBA_IN.B8 | length 2826.7
  Top Layer w10: v1(1760,2815) 1760,2804.18 1775,2789.18 1775,2745.63 C5.2 ; U4.4 v1(2005,1180) ; C1.1 2382.91,2205.16 2404.49,2226.73 2404.49,2227.91 2409.37,2232.8 C2.2 2405,2304.37 v1(2405,2375) 2399.88,2380.12 2399.88,2530.12 TB6560.6 ; C3.2 2620.95,1188.43 2646.57,1188.43 v1(2675,1160) 2675,1149.55 2620,1094.55 U3.5 ; U2.14 2915,1940 v1(2945,1970) ; U5.3 v1(3135,1175) ; U2.8 3194.37,1639.63 C4.1 ; D5.2@3577.84,655 D5.2 ; v1(3905,2430) 3905,2503.11 POWER.C ; v1(4290,485) 4290,568.04 4325,603.04 D1.1 ; RUSB2.1 4425,657.6 v1(4425,715) 4425,725.82 4444.48,745.31 4444.48,765.15 D3.1 ; D2.1 4572.5,632.5 4632.5,632.5 v1(4635,635) 4670.2,599.8 RUSB1.1 4670.2,545.94 4637.65,513.4 4637.65,492.65 v1(4630,485) ; SW1.5@4665,2531.57 SW1.5 ; SW1.2@4665,2744.97 SW1.2
  Top Layer w20: v1(3515,680) 3582.84,680 D5.2 ; C8.1 3966.18,1090 3994.47,1118.29 3994.47,1130 ; C7.1 3966.18,1180 3994.47,1151.71 3994.47,1130 ; v1(4045.39,1130) 3994.47,1130 ; v1(4215,1045) C.2 ; v1(4290,485) 4295.74,479.26 4295.74,484.26 4325,455 USBA_IN.A1-B12@4325,420 ; USBA_IN.A1-B12 USBA_IN.A1-B12@4329.02,427.89 ; USBA_IN.A12-B1 4582.98,419.39 4582.98,437.98 v1(4630,485) ; SW3.2 v1(4665,1685) SW3.5 SW3.5@4678.62,1590.35 ; SW2.5 v1(4665,2150) SW2.2 ; SW1.5@4665,2531.57 v1(4665,2640) SW1.2@4665,2744.97 ; SW1.5 SW1.5@4666.57,2532.4
  other v1: 395,500 695,500 995,500 1295,500 1595,500 1895,500 2195,500 2495,500 3995,610 395,800 695,800 995,800 1295,800 1595,800 2195,800 2795,800 3395,800 3995,800 4595,800 395,1100 695,1100 995,1100 1295,1100 1595,1100 2195,1100 2795,1100 4595,1100 3470,1175 3545,1175 3620,1175 3695,1175 3395,1250 3395,1325 395,1400 695,1400 995,1400 1295,1400 1595,1400 1895,1400 2795,1400 3095,1400 3395,1400 3995,1400 4295,1400 4595,1400 3395,1475 3395,1550 3470,1550 3545,1550 3620,1550 3695,1550 3470,1625 3545,1625 3620,1625 395,1700 695,1700 995,1700 1295,1700 1895,1700 2195,1700 2495,1700 3695,1700 4595,1700 395,2000 695,2000 995,2000 1295,2000 1595,2000 3695,2000 3215,2040 2200,2130 2315,2130 395,2300 695,2300 995,2300 1295,2300 1595,2300 1770,2300 3095,2300 3695,2300 3395,2440 395,2600 695,2600 995,2600 2795,2600 3395,2600 4295,2600 4600,2615 1555,2625 1375,2710 2195,2765 2495,2765 2795,2765 3095,2765 3395,2765 395,2900 695,2900 995,2900 3095,2900 3395,2900 3695,2900 3970,3000 4275,3000 395,3200 695,3200 995,3200 1295,3200 2195,3200 2495,3200 2795,3200 3095,3200 3395,3200 3695,3200 3995,3200 4595,3200 2045,3325 3165,3325 4325,3325 2045,3420 4325,3420 3165,3425 395,3500 695,3500 995,3500 1295,3500 1595,3500 4595,3500 2045,3525 4325,3525 3165,3530
JP-REG: C6.2 C10.1 REG_JP.1 U1.3 | length 674.5
  Top Layer w60: REG_JP.1 3822.56,1853.25 3825,1850.81 C10.1 3825.57,1849.43 3825.57,1728.62 3825.63,1728.56 3825.63,1445.63 3826.1,1445.16 U1.3
M1: SWG1.3 TB6560.23 | length 3963.3
  Top Layer w20: v1(1760,2890) 1755,2895 1755,3040 v1(1795,3080)
  Bottom Layer w20: TB6560.23 1545,2415 1515,2385 1390,2385 1365,2410 1365,2601.06 1658.94,2895 1755,2895 v1(1760,2890) ; v1(1795,3080) 1990,3275 SWG1.3
M2: SWG1.4 TB6560.22 | length 3572.5
  Top Layer w20: TB6560.22 1595,2536.83 1625,2566.83 v1(1625,3085)
  Bottom Layer w20: v1(1625,3085) 1710,3085 2000,3375 SWG1.4
MO: RUN.C TB6560.17 | length 169.4
  Top Layer w15: RUN.C TB6560.17
NetC_1: C.1 D4.C USB-JP.2 | length 250.9
  Top Layer w20: D4.C C.1 4367.5,1047.5 4367.5,1177.5 USB-JP.2
NetR6_2: R6.2 U3.2 | length 110.4
  Top Layer w20: R6.2 U3.2
NetR7_2: R7.2 U4.1 | length 140
  Top Layer w10: R7.2 U4.1
NetR8_2: R8.2 U5.1 | length 110.6
  Top Layer w10: R8.2 U5.1
NFA: R11.2 R13.2 R15.2 TB6560.14 | length 3705.2
  Top Layer w15: v1(4015,2740) R11.2
  Top Layer w20: v1(1995,2840) v1(2195,2840) ; R11.2 4114.28,2711.72 4129.53,2696.47 4157.81,2696.47 4210,2644.28 4210,2389.22 4113.56,2292.78 R13.2 4113.56,2207.22 4248.26,2072.52 R15.2
  Bottom Layer w15: TB6560.14 v1(1995,2840) ; v1(2195,2840) 2380,2840 2540,3000 2740,3000 2900,2840 3915,2840 v1(4015,2740)
NFB: R10.2 R12.2 R14.2 TB6560.11 | length 3243.6
  Top Layer w10: R10.2@4109.28,2535 R10.2
  Top Layer w15: v1(4015,2535) R10.2@4109.28,2535
  Top Layer w20: R10.2 4114.28,2497.22 4035,2417.93 4035,2171.35 4113.56,2092.78 R12.2 4113.56,1764.72 4248.26,1630.03 R14.2
  Bottom Layer w15: TB6560.11 2145,2570 2245,2670 3880,2670 v1(4015,2535)
OSC: C2.1 TB6560.7 | length 162.2
  Top Layer w10: C2.1 2345,2314.37 TB6560.7
OUT_AM: A.2 TB6560.13 | length 2707.3
  Top Layer w80: A.2@775,275 775,1025 v3(1685,1935)
  Bottom Layer w60: 2045,2355 TB6560.13
  Bottom Layer w80: v3(1685,1935) 1685,1995 2045,2355
OUT_AP: A.1 TB6560.16 | length 4602.1
  Top Layer w80: A.1@575,275 575,2605 1265,3295 1735,3295 1891.17,3138.83 1891.17,2843.83 v3(1895,2840)
  Bottom Layer w60: TB6560.16 v3(1895,2840)
OUT_BM: B.2 TB6560.9 | length 2540.4
  Bottom Layer w60: 2245,2330 TB6560.9
  Bottom Layer w80: B.2@1390,270 1390,1475 2245,2330
OUT_BP: B.1 TB6560.12 | length 3920.6
  Bottom Layer w60: 1970,2985 2095,2860 TB6560.12
  Bottom Layer w80: B.1@1190,270 B.1 1190,2855 1320,2985 1970,2985
R1: R1.1 SWG1.8 | length 2204.4
  Top Layer w20: R1.1 3198,2163 v1(3275,2240) ; v1(3405,2350) 4135,3080 4390,3080 4480,2990 4630,2990 SWG1.8
  Bottom Layer w10: 3377.35,2342.35 3397.35,2342.35 v1(3405,2350)
  Bottom Layer w20: v1(3275,2240) 3377.35,2342.35
R10-SW1: R10.1 SW1.6 | length 217.9
  Top Layer w20: R10.1 4357.29,2541.57 4556.58,2541.57 SW1.6
R11-SW1: R11.1 SW1.3 | length 216.4
  Top Layer w20: R11.1 4357.29,2738.43 4560.04,2738.43 SW1.3
R12-SW2: R12.1 SW2.6 | length 211.8
  Top Layer w20: R12.1 4356.57,2051.57 SW2.6@4566.18,2051.57
R13-SW2: R13.1 SW2.3 | length 211.8
  Top Layer w20: R13.1 4356.57,2248.43 SW2.3@4566.18,2248.43
R14-SW3: R14.1 SW3.6 | length 221.4
  Top Layer w20: R14.1 4361.74,1588.15 4555.16,1588.15 SW3.6
R15-SW3: R15.1 SW3.3 | length 208.3
  Top Layer w20: R15.1 4558.31,1785 SW3.3
R16-4N35: R16.2 U4.6 | length 100.3
  Top Layer w10: R16.2 1805,1194.37 U4.6
R17-LED: POWER.A R17.2 | length 86
  Top Layer w10: R17.2 3825,2430 3825,2484.53 3843.11,2502.64 POWER.A
R18-LED: R18.1 RUN.A | length 103.7
  Top Layer w15: R18.1 RUN.A
RESET: C1.2 R9.1 TB6560.5 | length 348
  Top Layer w10: TB6560.5 2445,2442.67 2460.47,2427.19 C1.2 2461.73,2203.9 R9.1
REXT/CEXT: C4.2 R19.1 U2.7 U2.15 | length 985.3
  Top Layer w10: U2.15 2865,1990.63 R19.1 2865,1999.37 v1(2865,2080) ; v1(3115.14,1748.16) 3115.07,1748.09 3115.07,1669.07 U2.7 3115,1570.63 C4.2
  Bottom Layer w10: v1(2865,2080) 2900,2115 3055,2115 3115.14,2054.86 v1(3115.14,1748.16)
TQ1: SWG1.1 SWG1.2 TB6560.2 | length 2285.1
  Top Layer w20: TB6560.2 v1(2965,2535) ; v1(3250,2535) 3415,2535 4055,3175 SWG1.2 SWG1.1
  Bottom Layer w20: v1(2965,2535) v1(3250,2535)
TQ2: R2.1 TB6560.1 | length 520.8
  Top Layer w20: TB6560.1 2945.63,2155.63 R2.1
VBUS12: D1.2 D4.A USBA_IN.A4-B9 USBA_IN.A9-B4 | length 645.1
  Top Layer w20: USBA_IN.A4-B9 4360.26,417.64 4360.26,489.74 v1(4360,490) 4365.67,495.67 4365.67,604 D1.2@4366.34,604.67 ; D4.A 4365.52,798.35 4365.52,607.48 4366.34,606.65 D1.2@4366.34,604.67 ; D1.2 D1.2@4366.34,604.67 ; USBA_IN.A9-B4 4549.74,417.64 4549.74,484.74 v1(4550,485)
  Bottom Layer w20: v1(4360,490) 4362.5,487.5 4547.5,487.5 v1(4550,485)
VMB/A: 12V.1 C7.2 C8.2 C9.1 D5.1 TB6560.8 TB6560.18 U1.1 | length 4771.4
  Top Layer w50: C9.1 3785,970 3883.5,1068.5 3883.5,1088.43 3885.08,1090 C8.2 ; U1.1 3875.36,1264.84 3876.93,1263.26 3876.93,1234.72 3881.26,1230.39 3881.26,1180 C7.2@3881.26,1153.74 ; C8.2@3886.26,1097.91 3886.26,1153.74 C7.2
  Top Layer w60: TB6560.18 1795,2620 1849.21,2674.21 2295,2674.21 ; TB6560.8 2295,2674.21 ; C9.1 3643.9,1060 3420,1060 3290,1190 3290,1570 3380,1660 3380,2255 2960.79,2674.21 2295,2674.21
  Top Layer w100: 12V.1 3735,557.17 3737.17,559.34 3737.17,660 D5.1 3737.17,680 C9.1@3737.17,966.73
~Q1-2: R1.2 R2.2 U2.4 U2.12 | length 785.9
  Top Layer w10: v1(2965,1580) U2.4 ; R2.2@3015,2050.63 R2.2 ; R1.2@3024.37,2161.74 R1.2
  Top Layer w20: U2.12 v1(3015,1961.81) R2.2@3015,2050.63 ; R2.2 R1.2@3024.37,2161.74
  Bottom Layer w10: v1(2965,1580) 2965,1745 3015,1795 v1(3015,1961.81)
pads on no net: SW1.1 SW1.4 SW2.1 SW2.4 SW3.1 SW3.4 TB6560.19 U2.5 U2.13 U3.1 U3.4 U3.7 U4.3 USBA_IN.13 USBA_IN.14 USBA_IN.15 USBA_IN.16 USBA_IN.17 USBA_IN.18 USBA_IN.A8
copper on no net:
  other v2: 1445,2845 2645,2849.96

## Polygon pours and split planes (outlines as drawn)
GND on Top Layer "GND_L01_P004" (solid, pour order 4): 4995,0 4995,4000 0,4000 0,3995 0,0
GND on Top Layer "GND_L01_P000" (solid, pour order 0): 3350,1225 3450,1125 3745,1125 3745,1130 3745,1890 3530,1890 3530,1725 3350,1545
GND on Bottom Layer "GND_L02_P003" (solid, pour order 3): 4995,0 4995,4000 0,4000 0,3995 0,0
GND on Bottom Layer "GND_L02_P001" (solid, pour order 1): 3350,1225 3450,1125 3745,1125 3745,1130 3745,1890 3530,1890 3530,1725 3350,1545

## Silkscreen, mask and mechanical layers (free items; w line width, h text height)
Top Overlay:
  lines w10: 4470,2975 4470,2825 4860,2825 4860,2975
  text "ASTROCOM" at 2190,3599.74 h150
  text "6" at 4900,3574.96 h60
  text "5" at 4900,3462.97 h60
  text "4" at 4900,3350.98 h60
  text "SPRING 2024" at 2190,3302.37 h150
  text "3" at 4900,3238.98 h60
  text "2" at 4900,3126.99 h60
  text "1" at 4910,3015 h60
  text "STEPPER V2" at 2185,3005 h150
  text "1  0" at 4530,2865 h80
  text "TB6560" at 790,2485 h80
  text "0  1" at 4525,2360 h80
  text "0  1" at 4525,1885 h80
  text "0  1" at 4515,1420 h80
  text "+  -" at 2990,35 h80
  text "+  -" at 3700,25 h80
  text "+  -" at 530,20 h80
  text "+  -" at 1140,20 h80
  text "+  -" at 1765,20 h80
  text "+  -" at 2385,20 h80
Bottom Overlay:
  text "ASTROCOM" at 2331.63,1858.11 h150
  text "SPRING 2024" at 2331.63,1640.74 h150
  text "STEPPER V2" at 2326.63,1423.36 h150
  text "SENIOR DESIGN" at 2361.63,1158.36 h150

## Text inside footprints (layer, text, board x,y; h text height)
SW1: Top Overlay "c&k" at 4548.45,2647.06 h19.68 r180
SW2: Top Overlay "c&k" at 4546.88,2158.79 h19.68 r180
SW3: Top Overlay "c&k" at 4546.88,1693.79 h19.68 r180
SWG1: Top Overlay "NO" at 4600.75,3015 h31.5 r90; Top Overlay "1" at 4739.25,3065 h31.5 r270; Top Overlay "2" at 4739.25,3165 h31.5 r270; Top Overlay "3" at 4739.25,3265 h31.5 r270; Top Overlay "4" at 4742.1,3374.03 h31.5 r235; Top Overlay "5" at 4739.25,3465 h31.5 r270; Top Overlay "6" at 4739.31,3563.63 h31.5 r275
USBA_IN: Mechanical 18 "-0.201in/-5.11mm" at 4184,662 h38.75; Mechanical 18 "0.201in/5.11mm" at 4408,762 h38.75; Mechanical 18 "-0.025in/-0.625mm" at 5003,417 h38.75; Mechanical 18 "-0.025in/-0.625mm" at 4803,417 h38.75; Mechanical 18 "0.314in/7.976mm" at 3388,273 h38.75; Mechanical 18 "0.067in/1.7mm" at 3834,396 h38.75; Mechanical 18 "0.457in/11.608mm" at 4285,862 h38.75; Mechanical 18 "0.228in/5.78mm" at 4307,762 h38.75; Mechanical 18 "0in/0mm" at 4079,437 h38.75; Mechanical 18 "0.252in/6.4mm" at 4319,662 h38.75; Mechanical 18 "Alt 2 Padstyle: OX90Y60D30P" at 3872,-932 h77.5; Mechanical 18 "Alt 1 Padstyle: OX60Y90D30P" at 3872,-857 h77.5; Mechanical 18 "Independent Mtg Hole 4 Padstyle: EX96Y96D96P" at 3493,-782 h77.5; Mechanical 18 "Independent Mtg Hole 3 Padstyle: EX96Y96D96P" at 3493,-707 h77.5; Mechanical 18 "Independent Mtg Hole 2 Padstyle: RX85Y79D0T" at 3516,-632 h77.5; Mechanical 18 "Independent Mtg Hole 1 Padstyle: RX85Y79D0T" at 3516,-557 h77.5; Mechanical 18 "Second Mounting Padstyle: RX85Y79D0T" at 3668,-482 h77.5; Mechanical 18 "Mounting Padstyle: EX26Y26D26P" at 3804,-407 h77.5; Mechanical 18 "Second Bottom Row Padstyle: EX55Y55D32P" at 3600,-332 h77.5; Mechanical 18 "Bottom Row Padstyle: RX24Y45D0T" at 3781,-257 h77.5; Mechanical 18 "2nd Middle Row Padstyle: RX12Y45D0T" at 3690,-182 h77.5; Mechanical 18 "Middle Row Padstyle: RX24Y45D0T" at 3781,-107 h77.5; Mechanical 18 "Top Row Padstyle:RX24Y45D0T" at 3857,-32 h77.5; Mechanical 7 "*" at 4206,392 h77.5; Bottom Assembly "*" at 4206,392 h77.5